# Altium PCB HFM_SWD.PcbDoc
Units mil, origin at the board's own origin, x right, y up, seen from the top; angles counter-clockwise.
Board outline 1310 x 570 mil, 2 copper layers (Top Layer, Bottom Layer); 2 components, 4 nets, 14 pads, 0 vias.
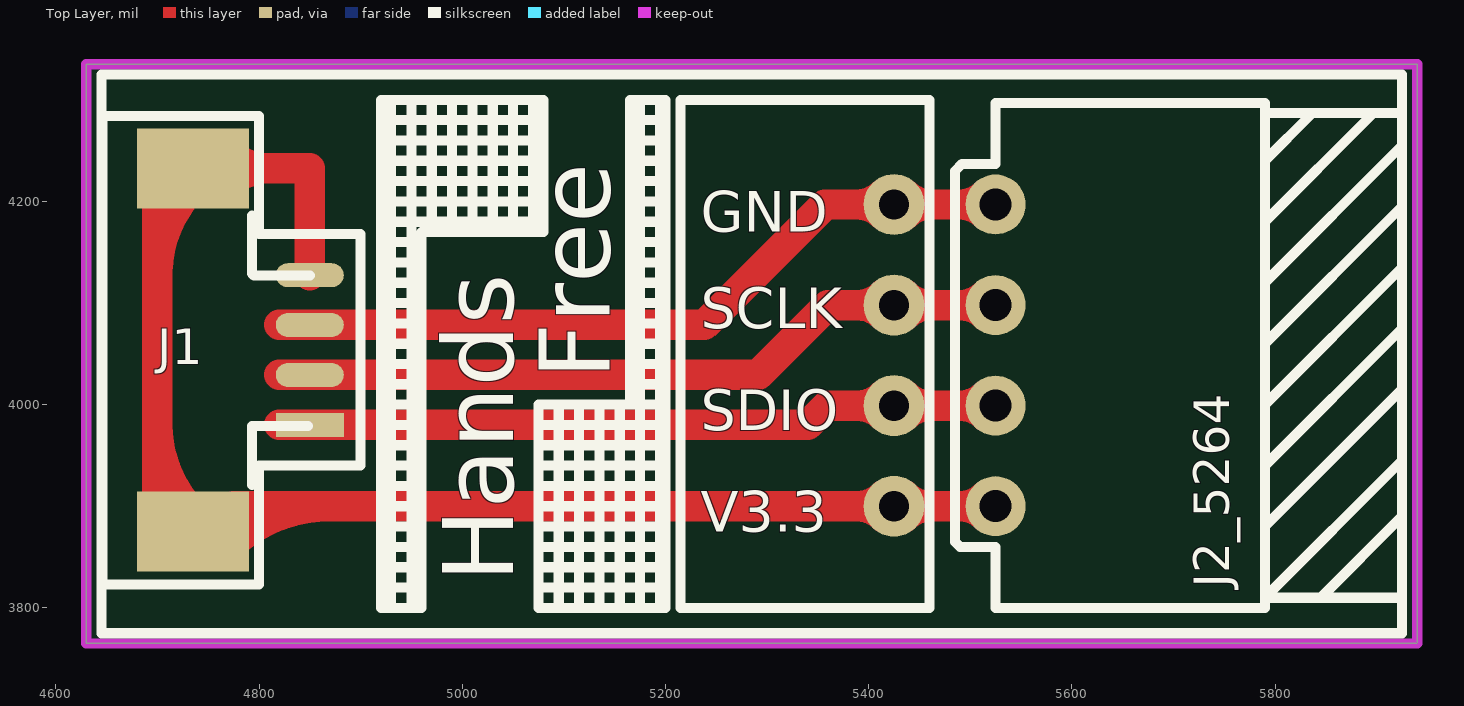
[diagram p0: Top Layer view]
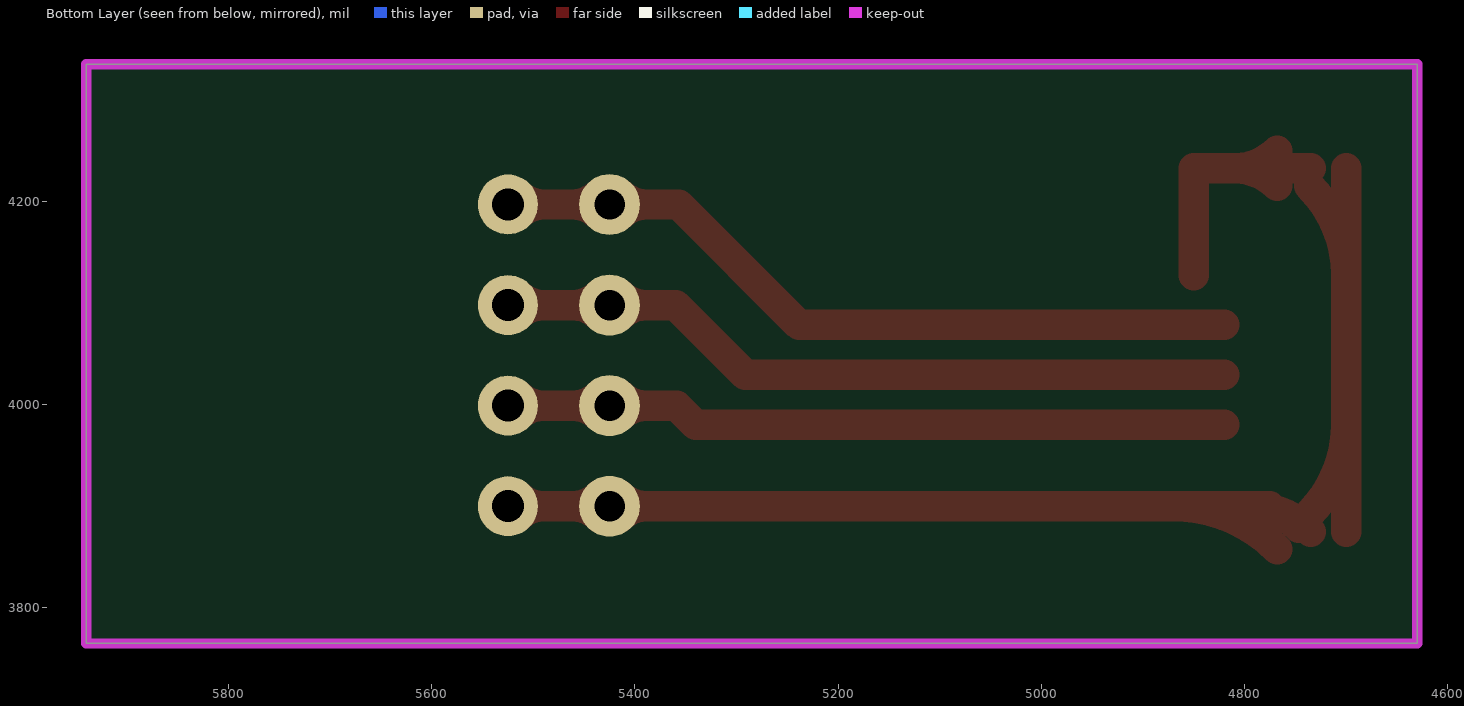
[diagram p1: Bottom Layer view, seen from below]

## Layer stack, top to bottom
Top Layer: signal copper 1.4
Dielectric: dielectric 12.6, FR-4, Dk 4.8
Bottom Layer: signal copper 1.4

## Board outline
4630,4335 5940,4335 5940,4200 5940,3765 5845,3765 4630,3765 4630,3870

## Design rules (kind name [scope] priority, off if disabled: settings)
Clearance [All] p1: gap=9
ComponentClearance [All] p1 off: gap=10 collisioncheckmode=3 verticalgap=10 showdistances=FALSE
Height [All] p1 off: minheight=0 maxheight=1000 prefheight=500
HoleToHoleClearance [All] p1: gap=6 allowstackedmicrovias=TRUE
MinimumSolderMaskSliver [All] p1: minsoldermaskwidth=0
PolygonConnect [All] p1: connectstyle=Relief reliefconductorwidth=10 reliefentries=4 polygonreliefangle="90 Angle" airgapwidth=10
RoutingVias [All] p1: holewidth=28 width=50 viastyle="Through Hole" minholewidth=10 minwidth=20 maxholewidth=50 maxwidth=50
SilkToSilkClearance [All] p1: silktosilkclearance=0
SilkToSolderMaskClearance [IsPad] p1: minsilkscreentomaskgap=0 clearancetoexposedcopper=TRUE
SolderMaskExpansion [All] p1: expansion=4
Width [All] p1: maxlimit=200 minlimit=7 preferedwidth=7
22 further rules are at their usual default settings.

## Components (designator, comment, footprint, x,y, rotation, side; value= is the part's Value field where it differs from the comment)
J1 "HANDS_FREE_SWD" HDR_Molex_PH_1.25_4P 4850,3980 r90 top
J2_5264 "HDR_Header_1*4" HDR_MOLEX_5264_DH_4P 5525,3900 r90 top

## Footprints (in the part's own frame and the unit in brackets; to place one, negate y for a bottom-side part, rotate by r counter-clockwise, add the part's x,y. Pads: shape width x height; smd on the part's side, far side on the other; paste and mask are expansions set on the pad)
HDR_MOLEX_5264_DH_4P [mm]
  round 1.5 hole 0.8: 1(0,0) 2(2.515,0) 3(5.029,0) 4(7.544,0)
  silkscreen extent -2.54,-10.16 10.16,1.02
HDR_Molex_PH_1.25_4P [mm]
  rect 0.6x1.7 smd: 1(0,0)
  oval 0.6x1.7 smd: 2(1.25,0) 3(2.5,0) 4(3.745,0)
  rect 2x2.8 smd: 5(-2.667,2.921) 6(6.417,2.921)
  silkscreen extent -3.99,-1.27 7.72,5.18

## Part data
J1: "卧贴 molex 1.25间距 4P接口"

## Free pads (board coordinates)
  round 60 hole 30: 3(5425,4197) 4(5425,4098) 5(5425,3999) 6(5425,3900)

## Nets (pads, with @x,y where several pads share a name; then routed paths per layer and width w, separated by ;. In a path a pad name is that pad's centre, name@x,y a point inside that pad or via, vN(x,y) a via of type N, cw(c..) or ccw(c..) an arc to the next point about the centre after c; other vN are vias at no path point)
GND: J1.3 J2_5264.4 pad.3 | length 923
  Top Layer w30: J1.3@4820,4078.43 5238.43,4078.43 5357,4197 pad.3 J2_5264.4 ; pad.3@5414.39,4186.39 ccw(c5388.79,4160.79) 5388.79,4197 ccw(c5388.79,4233.21) pad.3@5414.39,4207.61 ; pad.3@5435.61,4186.39 cw(c5461.21,4160.79) 5461.21,4197 cw(c5461.21,4233.21) pad.3@5435.61,4207.61 ; J2_5264.4@5514.73,4186.73 ccw(c5489.93,4161.93) 5489.93,4197 ccw(c5489.93,4232.07) J2_5264.4@5514.73,4207.27
SWCLK: J1.2 J2_5264.3 pad.4 | length 902.4
  Top Layer w30: J1.2@4820,4029.21 5291.21,4029.21 5360,4098 pad.4 J2_5264.3 ; pad.4@5414.39,4087.39 ccw(c5388.79,4061.79) 5388.79,4098 ccw(c5388.79,4134.21) pad.4@5414.39,4108.61 ; pad.4@5435.61,4087.39 cw(c5461.21,4061.79) 5461.21,4098 cw(c5461.21,4134.21) pad.4@5435.61,4108.61 ; J2_5264.3@5514.73,4087.73 ccw(c5489.93,4062.93) 5489.93,4098 ccw(c5489.93,4133.07) J2_5264.3@5514.73,4108.27
SWDIO: J1.1 J2_5264.2 pad.5 | length 881.7
  Top Layer w30: J1.1@4820,3980 5340,3980 5359,3999 pad.5 J2_5264.2 ; pad.5@5414.39,3988.39 ccw(c5388.79,3962.79) 5388.79,3999 ccw(c5388.79,4035.21) pad.5@5414.39,4009.61 ; pad.5@5435.61,3988.39 cw(c5461.21,3962.79) 5461.21,3999 cw(c5461.21,4035.21) pad.5@5435.61,4009.61 ; J2_5264.2@5514.73,3988.73 ccw(c5489.93,3963.93) 5489.93,3999 ccw(c5489.93,4034.07) J2_5264.2@5514.73,4009.27
VCC3.3V: J1.4 J1.5 J1.6 J2_5264.1 pad.6 | length 2020.1
  Top Layer w30: J1.5@4700,3875 4700,4130 J1.6@4700,4232.64 ; 4700,3980.31 ccw(c4824.57,3980.31) J1.5@4736.48,3892.23 ; 4700,4128.22 cw(c4822.42,4128.22) J1.6@4736.38,4215.3 ; J1.5 cw(c4795.36,3814.64) 4795.36,3900 ; J1.6 4850,4232.64 J1.4 ; J1.5@4746.77,3878.98 cw(c4797.51,3828.24) 4797.51,3900 ; J1.5@4767.98,3857.77 cw(c4869.94,3755.81) 4869.94,3900 ; J1.6@4767.98,4215.41 cw(c4809.58,4173.8) 4809.58,4232.64 cw(c4809.58,4291.47) J1.6@4767.98,4249.87 ; J1.5@4775.36,3900 J2_5264.1 ; pad.6@5414.39,3889.39 ccw(c5388.79,3863.79) 5388.79,3900 ccw(c5388.79,3936.21) pad.6@5414.39,3910.61 ; pad.6@5435.61,3889.39 cw(c5461.21,3863.79) 5461.21,3900 cw(c5461.21,3936.21) pad.6@5435.61,3910.61 ; J2_5264.1@5514.73,3889.73 ccw(c5489.93,3864.93) 5489.93,3900 ccw(c5489.93,3935.07) J2_5264.1@5514.73,3910.27

## Polygon pours and split planes (outlines as drawn)
no net on Top Overlay "Top Overlay-No Net" (hatched 90Degree grid 20 track 10): 5200,4300 5165,4300 5165,4230 5165,4000 5105,4000 5075,4000 5075,3960 5075,3800 5200,3800
no net on Top Overlay "Top Overlay-No Net" (hatched 90Degree grid 20 track 10): 4920,3800 4960,3800 4960,4170 5020,4170 5080,4170 5080,4300 4920,4300

## Keep-outs
Keep-Out Layer:
  lines w10: 4630,3765 5940,3765 5940,4335 4630,4335 4630,3765

## Silkscreen, mask and mechanical layers (free items; w line width, h text height)
Top Overlay:
  lines w10: 5175,3800 5175,4300 ; 4645,3775 4645,4325 5925,4325 5925,3775 4645,3775 ; 5215,3800 5460,3800 5460,3850 5460,4250 5460,4300 5215,4300 5215,3800
  text "GND" at 5235,4170 h40
  text "SCLK" at 5235,4075 h40
  text "Free" at 5145,4025 h70 r90
  text "SDIO" at 5235,3975 h40
  text "V3.3" at 5235,3875 h40
  text "Hands" at 5050,3825 h70 r90